# Altium PCB radxa_cm3_io_board_v1360_pcb_layout.PcbDoc (part 3 of 7)
Units mil, origin at the board's own origin, x right, y up, seen from the top; angles counter-clockwise.
Board outline 6299.61 x 3544.09 mil, 4 copper layers (Top, GND, Power, Bottom), stack 35.4 mil thick; 513 components, 397 nets, 1855 pads, 2695 vias.
Unrouted connection lines stored in the file: 280.
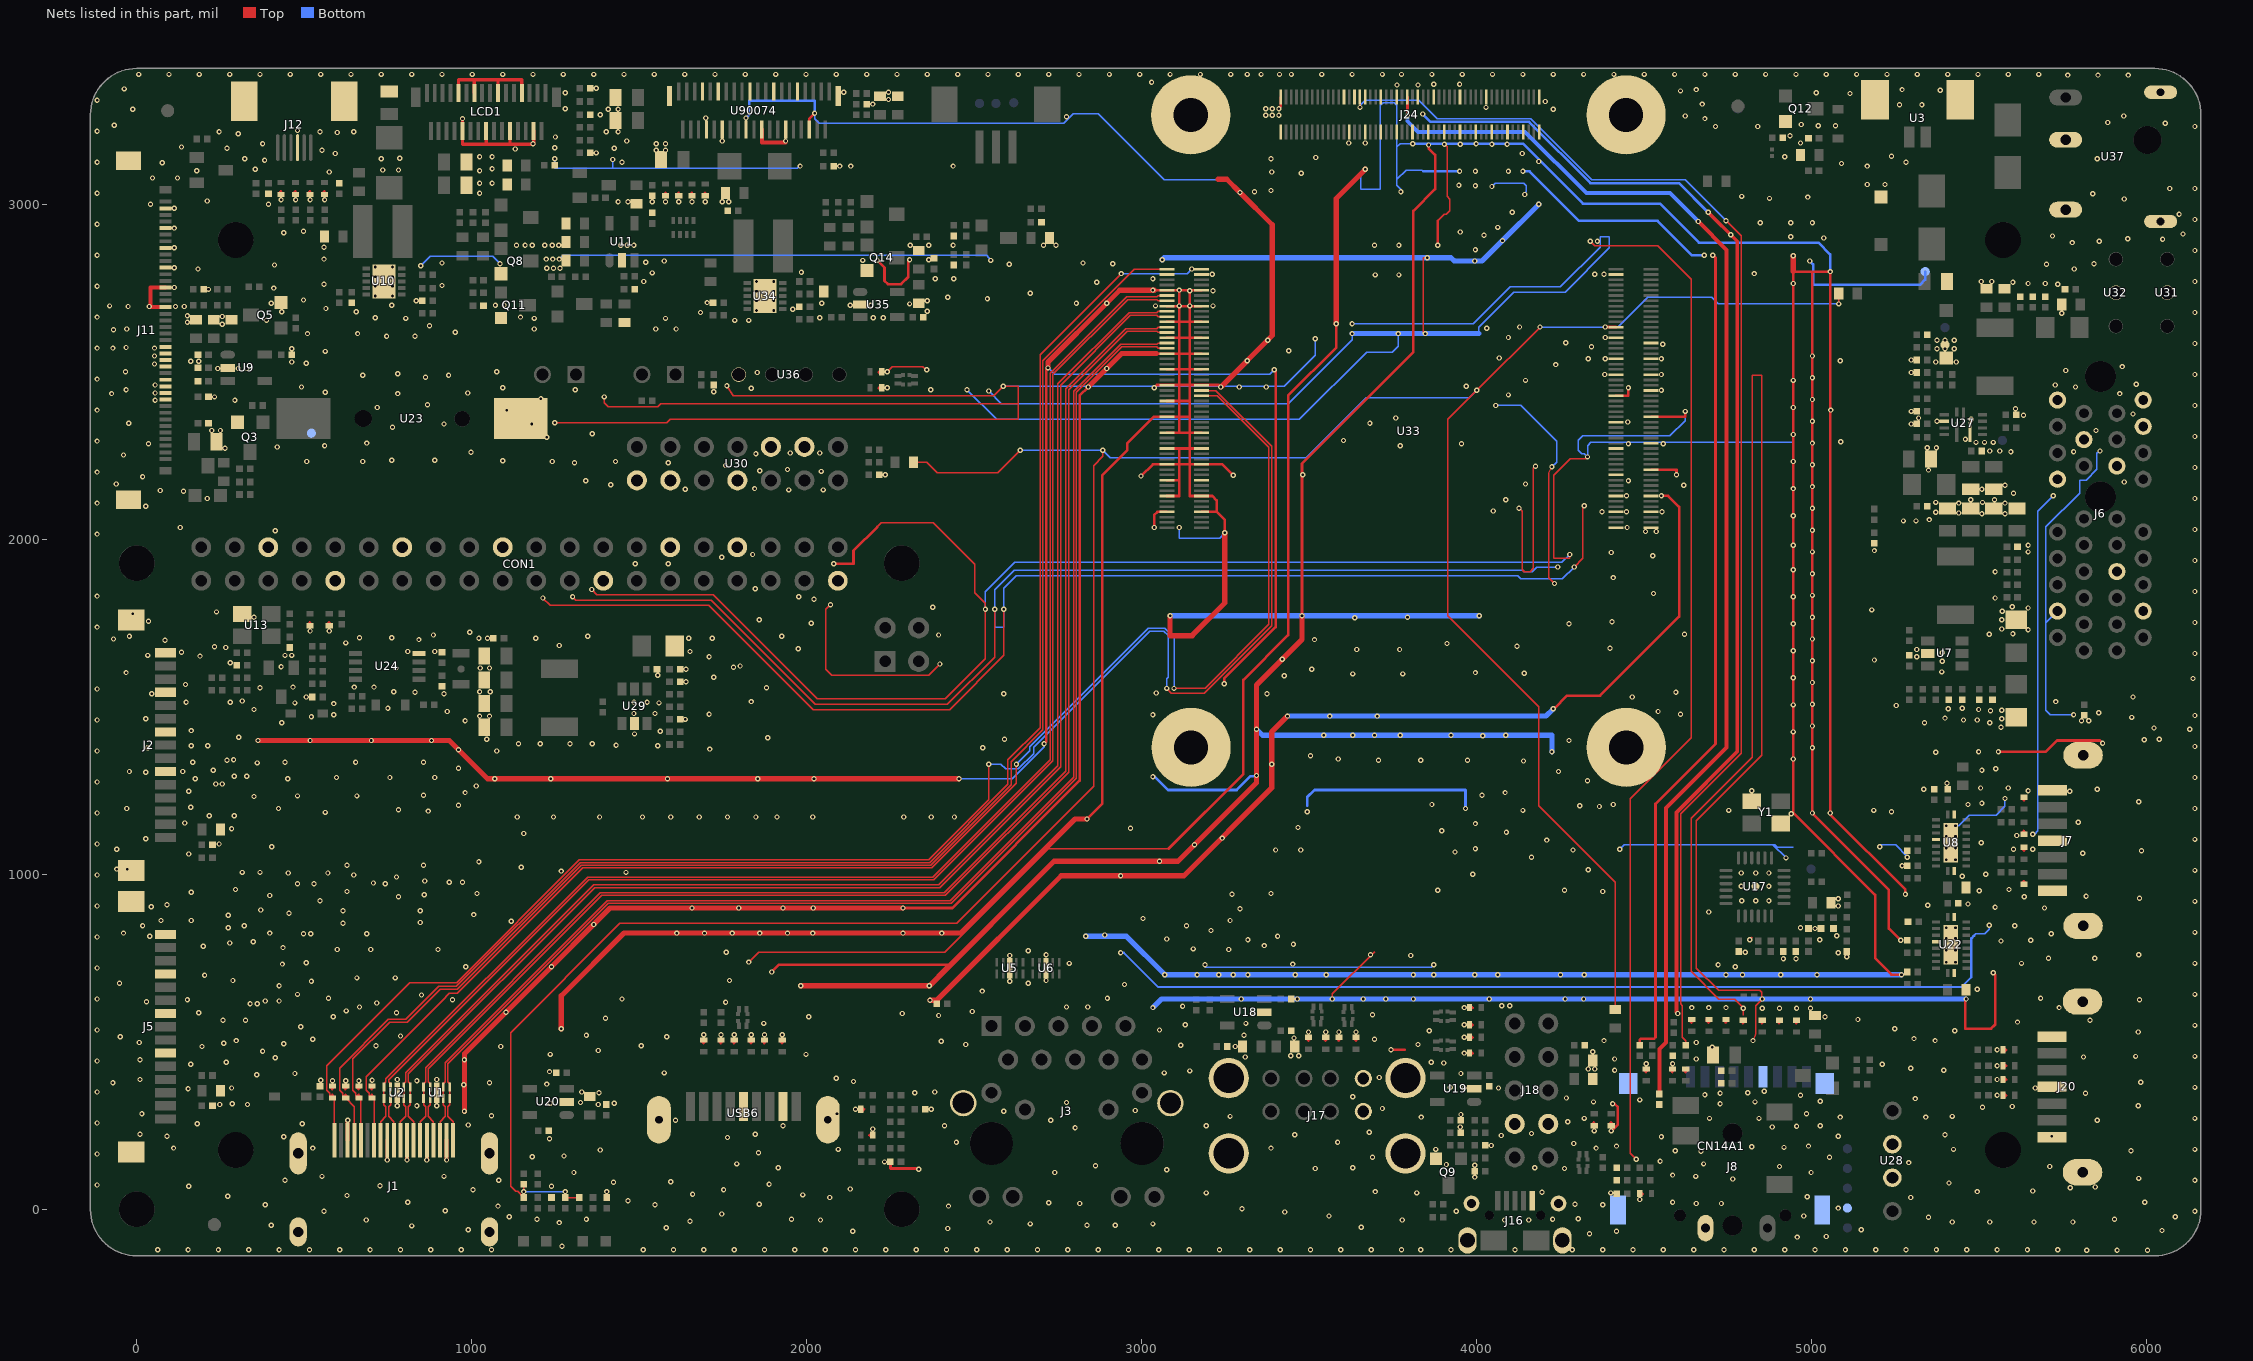
[diagram p5: the nets of this part, all layers, seen from the top]

## Via types
v1: diameter 15.75, hole 7.87, Top to Bottom, 2660 vias
v2: diameter 19.68, hole 11.81, Top to Bottom, 35 vias

## Nets (pads, with @x,y where several pads share a name; then routed paths per layer and width w, separated by ;. In a path a pad name is that pad's centre, name@x,y a point inside that pad or via, vN(x,y) a via of type N, cw(c..) or ccw(c..) an arc to the next point about the centre after c; other vN are vias at no path point) (continued)
GND: C1.2 C2.2 C3.1 C4.2 C5.2 C7.2 C8.2 C10.2 C11.2 C13.2 C14.2 C15.2 C16.2 C17.2 C18.2 C19.2 C20.2 C21.2 C22.2 C23.2 C25.1 C26.1 C27.2 C28.2 C29.2 C30.2 C35.2 C36.2 C37.2 C39.2 C40.2 C41.2 C42.2 C45.2 C46.2 C47.2 C48.2 C49.2 C50.2 C51.2 C52.2 C53.1 C54.2 C56.2 C57.2 C58.2 C59.2 C60.2 C61.2 C62.2 C63.2 C70.2 C72.2 C83.1 C84.2 C85.2 C86.2 C87.2 C88.2 C89.2 C91.2 C92.2 C93.2 C94.2 C95.2 C96.2 C97.2 C98.2 C99.2 C100.2 C101.2 C109.2 C111.2 C123.2 C124.2 C125.2 C130.2 C131.2 C132.2 C133.2 C134.2 C135.2 C136.2 C137.2 C138.2 C139.2 C140.2 C141.2 C142.2 C143.2 C144.2 C146.2 C147.2 C149.2 C150.2 C151.1 C152.2 C153.2 C154.2 C155.2 C156.2 C157.2 C158.2 C159.2 C160.2 C161.2 C164.1 C166.2 C167.2 C168.2 C169.2 C170.2 C171.2 C172.2 C173.2 C174.2 C175.2 C176.2 CN14A1.6 CN14A1.10 CN14A1.11 CN14A1.12 CN14A1.13 CON1.6 CON1.9 CON1.14 CON1.20 CON1.25 CON1.30 CON1.34 CON1.39 D2.1 D3.1 D4.1 D5.1 D6.1 D7.1 D8.1 D9.1 D10.1 D11.1 D12.1 D14.2 D15.2 D16.2 D17.2 D18.1 D19.1 D20.1 D21.1 D22.1 D23.1 D24.1 D25.1 D26.1 D27.1 D30.1 D31.1 D32.1 D33.1 D34.1 D35.1 D36.1 D37.1 D38.1 D39.1 D40.1 D41.1 D47.1 D48.1 D49.1 ED1.2 ED2.2 ED3.2 ED4.2 ED9.2 ED10.2 ED11.2 ED12.2 ED13.2 ED14.2 ED15.2 ED16.2 ED17.2 ED18.2 ED19.2 J1.2 J1.5 J1.8 J1.11 J1.17 J1.20 J1.21 J1.22 J1.23 J2.6 J2.9 J2.12 J2.15 J2.16 J2.17 J3.19 J3.20 J5.6 J5.9 J5.12 J5.15 J5.16 J5.17 J6.A4 J6.A12 J6.A15 J6.A18 J6.B4 J6.B7 J6.B13 J6.B16 J6.B18 J7.1 J7.4 J7.7 J7.8 J7.9 J8.2 J11.2 J11.5 J11.8 J11.11 J11.14 J11.17 J11.23 J11.24 J11.25 J11.26 J11.28 J11.29 J11.30 J11.31 J11.43 J11.44 J12.3 J12.7 J12.8 J16.5 J16.6 J16.7 J16.8 J16.9 J17.4 J17.8 J17.9 J17.10 J17.11 J17.12 J18.7 J18.8 J20.1 J20.4 J20.7 J20.8 J20.9 J24.1 J24.2 J24.7 J24.13 J24.19 J24.22 J24.25 J24.31 J24.32 J24.37 J24.42 J24.43 J24.48 J24.49 J24.55 J24.56 J24.61 J24.62 J24.67 J24.68 J24.72 J24.73 J24.76 J24.99 J24.100 LCD1.9 LCD1.10 LCD1.13 LCD1.16 LCD1.19 LCD1.22 LCD1.25 LCD1.28 P6.1 Q3.2 Q5.2 Q8.2 Q9.2 Q11.2 Q12.2 Q14.2 R1.1 R7.1 R17.2 R18.2 R20.2 R25.1 R26.2 R27.1 R30.1 R33.1 R38.1 R42.2 R43.2 R52.1 R55.2 R56.2 R60.2 R67.1 R72.2 R73.1 R97.1 R101.2 R102.2 R108.2 R115.2 R119.2 R127.2 R132.1 R133.2 R152.1 R154.1 R160.2 R161.2 R166.2 R174.2 R177.2 R182.2 R187.1 R189.2 R192.2 R195.2 R206.1 R208.1 R9209.2 TP1.1 TP7.1 TP11.1 U1.3 U1.8 U2.3 U2.8 U3.3 U3.4 U5.3 U5.8 U6.3 U6.8 U7.2 U8.4 U8.10 U8.19 U8.21 U9.2 U10.11 U11.2 U13.2 U17.25 U18.2 U19.2 U20.2 U22.4 U22.10 U22.19 U22.21 U23.2 U24.4 U27.2 U27.10 U28.2 U28.3 U29.2 U30.1 U30.3 U30.7 U30.10 U30.12 U31.2 U32.2 U33.1 U33.2 U33.7 U33.8 U33.13 U33.14 U33.22 U33.23 U33.32 U33.33 U33.42 U33.43 U33.52 U33.53 U33.59 U33.60 U33.65 U33.66 U33.71 U33.74 U33.98 U33.107 U33.108 U33.113 U33.114 U33.119 U33.120 U33.125 U33.126 U33.131 U33.132 U33.137 U33.138 U33.144 U33.150 U33.155 U33.156 U33.161 U33.162 U33.167 U33.168 U33.173 U33.174 U33.179 U33.180 U33.185 U33.186 U33.191 U33.192 U33.197 U33.198 U33.201 U33.202 U33.203 U33.204 U34.11 U35.2 U36.4 U37.2 U37.3 U37.4 U37.5 U90074.6 U90074.9 U90074.12 U90074.15 U90074.18 U90074.21 U90074.22 U90074.28 U90074.29 U90074.32 U90074.33 U90074.40 U90074.41 USB6.4 USB6.7 USB6.10 USB6.11 Y1.2 Y1.4 | length 100096.5
  Top w3.94: v1(1212.6,1824.8) 1234.25,1803.15 1707.93,1803.15 2018.95,1492.13 2426.61,1492.13 2588.58,1654.1 v1(2588.58,1791.34) ; v1(1248.03,2348.43) 1582.68,2348.43 1592.52,2358.27 2631.89,2358.27 2631.89,2405.51 ; v1(1301.18,1828.74) 1311.02,1818.9 1714.45,1818.9 2025.47,1507.87 2420.08,1507.87 2561.02,1648.81 v1(2561.02,1791.34) ; v1(1358.27,1850.39) 1374.02,1834.65 1720.97,1834.65 2032,1523.62 2413.56,1523.62 2533.46,1643.53 v1(2533.46,1791.34) 2533.46,1809.06 2501.97,1840.55 2501.97,1925.2 2377.95,2049.21 2222.44,2049.21 2210.63,2037.4 ; v1(1395.67,2425.2) 1395.67,2407.48 1407.48,2395.67 1555.12,2395.67 1564.96,2405.51 2631.89,2405.51 ; v1(1761.81,2458.66) 1781.5,2429.13 2559.06,2429.13 v1(2586.61,2456.69) 2631.89,2456.69 2631.89,2405.51 ; v1(1826.77,738.19) 1856.3,767.72 2411.42,767.72 2720.47,1076.77 3080.71,1076.77 ; v1(2070.87,1805.12) 2057.09,1791.34 2057.09,1612.2 2074.8,1594.49 2364.17,1594.49 v1(2397.64,1627.95) ; v1(2240.16,2500) 2255.91,2515.75 2346.46,2515.75 2356.3,2505.91 v1(2358.27,2505.91) ; v1(3568.9,627.95) 3568.9,643.7 3694.88,769.68 ; v1(3846.46,2614.17) 3840.55,2620.08 3840.55,2840.55 v1(3852.36,2840.55) ; 3883.86,2950.79 3903.54,2970.47 3909.45,2970.47 3919.29,2980.31 3919.29,3015.75 3911.42,3023.62 3911.42,3171.26 v1(3903.54,3179.13) ; v1(4125.98,2092.52) 4127.95,2092.52 4135.83,2084.65 4135.83,1909.45 4141.73,1903.54 4159.45,1903.54 4169.29,1913.39 4169.29,2212.6 v1(4175.2,2218.5) ; v1(4224.41,2216.54) 4214.57,2198.82 4214.57,1885.83 v1(4232.28,1868.11) ; v1(4277.56,1954.72) 4277.56,1942.91 4230.31,1942.91 4230.31,2190.94 4279.53,2240.16 4324.8,2240.16 v1(4330.71,2246.06) ; v1(4291.34,1917.32) 4316.93,1942.91 4316.93,2096.46 4320.87,2104.33 v1(4320.87,2100.39) ; v1(4338.58,2889.76) 4352.36,2875.98 4540.72,2875.98 4639.76,2776.94 4639.76,1407.56 4458.66,1226.46 4458.66,167.32 v1(4476.38,149.61) ; 4795.28,580.12 v1(4795.28,600.39) 4795.28,602.36 4769.69,627.95 4722.44,627.95 4639.76,710.63 4639.76,1167.26 4822.83,1350.34 4822.83,2490.16 4850.39,2490.16 4850.39,1355.62 4655.51,1160.74 4655.51,720.47 4722.44,653.54 4844.49,653.54 4850.39,647.64 4850.39,625.98 4832.68,608.27 4832.68,523.62 v1(4824.8,503.94) ; v1(4814.96,805.12) 4822.83,812.99
  Top w7.87: v1(1895.67,708.66) 1917.32,730.31 2419.29,730.31 2419.29,720.47 ; U90074.6@2007.87,3223.43 2007.87,3255.91 v1(2023.62,3271.65) ; v1(2080.71,1927.17) 2139.76,1927.17 2139.76,1966.54 2210.63,2037.4 ; v1(2210.63,2832.68) 2232.28,2811.02 2232.28,2771.65 2242.13,2761.81 2281.5,2761.81 2303.15,2783.46 2303.15,2830.71 v1(2307.09,2834.65) ; R1.1@2250,141.73 2250,122.05 2332.68,122.05 v1(2334.65,120.08) ; v1(2287.4,899.61) 2435.02,899.61 2814.96,1279.55 2814.96,2429.13 v1(2840.55,2454.72) ; v1(2708.66,1389.76) 2714.57,1395.67 2714.57,2505.91 v1(2720.47,2511.81) ; v1(2836.61,1165.35) 2881.89,1210.63 2881.89,2190.94 2956.69,2265.75 2956.69,2286.61 3035.63,2365.55 U33.144@3075.2,2365.55 3112.2,2365.55 ; v1(2998.03,2188.98) 3033.46,2223.82 U33.126@3075.2,2223.82 ; v1(3037.4,2035.43) 3037.4,2072.83 3046.65,2082.09 U33.108@3075.2,2082.09 ; v1(3037.4,2452.76) 3045.28,2460.63 3112.2,2460.63 ; v1@3037.4,2743.5 U33.192@3075.2,2743.5 v1@3112.2,2743.5 ; 3043.31,2554.53 U33.168@3075.2,2554.53 3112.2,2554.53 ; U33.114@3075.2,2129.33 3112.2,2129.33 3112.2,2223.82 ; U33.120@3075.2,2176.57 3112.2,2176.57 3112.2,2223.82 ; U33.138@3075.2,2318.31 3112.2,2318.31 ; U33.150@3075.2,2412.8 3112.2,2412.8 ; U33.156@3075.2,2460.04 3112.2,2460.04 ; U33.162@3075.2,2507.28 3112.2,2507.28 ; U33.174@3075.2,2601.77 3112.2,2601.77 ; U33.180@3075.2,2649.02 3112.2,2649.02 ; U33.186@3075.2,2696.26 v1@3112.2,2696.26 ; 3080.71,1076.77 3303.15,1299.21 3303.15,1580.71 3437.01,1714.57 3437.01,2429.13 3580.71,2572.83 v1(3580.71,2643.7) ; 3111.64,2318.31 3112.2,2317.74 3112.2,2318.31 ; v1(3112.2,2744.09) v1@3112.2,2743.5 ; v1(3143.7,2742.13) v1(3143.7,2696.85) v1@3143.7,2696.26 ; U33.107@3179.13,2082.09 3223.82,2082.09 ; U33.131@3179.13,2271.06 3143.7,2271.06 ; U33.137@3179.13,2318.31 3143.7,2318.31 ; U33.155@3179.13,2460.04 3143.7,2460.04 ; U33.191@3179.13,2743.5 v1@3112.2,2743.5 ; v1(3236.22,2454.72) 3230.31,2460.63 3143.7,2460.63 ; v1(3246.06,1568.9) 3246.06,1584.65 3399.61,1738.19 3399.61,2501.97 v1(3395.67,2505.91) ; v1(3248.03,2019.68) 3248.03,2058.46 3224.41,2082.09 3223.82,2082.09 ; v1(3273.62,2190.94) 3240.75,2223.82 U33.125@3179.13,2223.82 3143.7,2223.82 ; v1(3409.45,3285.43) 3414.76,3290.75 J24.100@3414.76,3320.08 ; v1(3478.35,1771.65) 3478.35,2226.38 3811.02,2559.06 3811.02,2980.31 3875.98,3045.28 3875.98,3147.64 3856.3,3167.32 v1(3856.3,3177.17) ; v1(3744.09,476.38) 3785.43,476.38 ; v1(3883.86,2877.95) 3883.86,2950.79 ; v1(4228.35,1494.09) 4230.31,1494.09 4269.69,1533.46 4368.11,1533.46 4604.33,1769.68 4604.33,2096.46 4570.87,2129.92 v1(4551.18,2129.92) ; v1(4401.57,234.25) 4421.26,253.94 4421.26,305.12 4411.42,314.96 v1(4405.51,314.96) ; U33.52@4415.75,2428.54 4452.76,2428.54 v1(4452.76,2452.76) ; C15.2@4486.22,490.16 4486.22,505.91 4490.16,509.84 4529.53,509.84 4533.46,513.78 4533.46,1210.63 4712.6,1389.76 4712.6,2840.55 v1(4704.72,2848.43) ; U33.23@4520.47,2208.07 4596.46,2208.07 v1(4596.46,2192.91) ; U33.43@4520.47,2365.55 4622.05,2365.55 v1(4622.05,2381.89) ; v1(5001.97,2482.28) v1(5001.97,2547.24) ; v1(5265.75,803.15) 5230.31,838.58 5230.31,952.76 5001.97,1181.1 v1(5001.97,1183.07) v1(5001.97,1377.95) v1(5001.97,1442.91) v1(5001.97,1507.87) v1(5001.97,1572.83) v1(5001.97,1637.8) v1(5001.97,1702.76) v1(5001.97,1767.72) v1(5001.97,1832.68) v1(5001.97,1897.64) v1(5001.97,1962.6) v1(5001.97,2027.56) v1(5001.97,2092.52) v1(5001.97,2157.48) v1(5001.97,2222.44) v1(5001.97,2417.32) v1(5001.97,2352.36) v1(5001.97,2287.4) v1(5001.97,2547.24) ; v1(5267.72,700.79) 5238.19,700.79 5188.98,750 5188.98,938.98 4944.88,1183.07 4944.88,2799.21 ; v1(5279.53,940.94) 5279.53,954.72 5055.12,1179.13 v1(5055.12,1183.07) v1(5055.12,2799.21) 4944.88,2799.21 ; v1(5460.63,627.95) 5458.66,625.98 5458.66,539.37 5535.43,539.37 5547.24,551.18 5547.24,700.79 v1(5541.34,706.69) ; v1(5557.09,1366.14) 5698.82,1366.14 5732.28,1399.61 5860.24,1399.61 v1(5868.11,1391.73) ; U33.126@3075.2,2223.82 3112.2,2223.82 ; U33.126@3075.2,2223.82 3143.7,2223.82 ; 3112.2,2223.82 3112.2,2271.06 ; 3112.2,2223.82 3143.7,2223.82 ; 3112.2,2271.06 3143.7,2271.06 ; 3112.2,2271.06 U33.132@3075.2,2271.06 3143.7,2271.06 ; 3112.2,2318.31 3112.2,2365.55 ; 3112.2,2318.31 3143.7,2318.31 ; 3112.2,2365.55 3143.7,2365.55 ; 3112.2,2365.55 3112.2,2412.8 ; 3112.2,2412.8 3143.7,2412.8 ; 3112.2,2412.8 3112.2,2460.04 ; 3112.2,2460.04 3143.7,2460.04 ; 3112.2,2460.04 3112.2,2460.63 ; 3112.2,2460.63 3143.7,2460.63 ; 3112.2,2460.63 3112.2,2507.28 ; 3112.2,2507.28 3143.7,2507.28 ; 3112.2,2507.28 3112.2,2554.53 ; 3112.2,2507.28 U33.161@3179.13,2507.28 3143.7,2507.28 ; 3112.2,2554.53 3143.7,2554.53 ; 3112.2,2554.53 3112.2,2601.77 ; 3112.2,2554.53 U33.167@3179.13,2554.53 3143.7,2554.53 ; 3112.2,2601.77 3143.7,2601.77 ; 3112.2,2601.77 3112.2,2649.02 ; 3112.2,2601.77 U33.173@3179.13,2601.77 3143.7,2601.77 ; 3112.2,2649.02 3143.7,2649.02 ; 3112.2,2649.02 v1@3112.2,2696.26 ; 3112.2,2649.02 U33.179@3179.13,2649.02 3143.7,2649.02 ; v1@3112.2,2696.26 v1@3143.7,2696.26 ; v1@3112.2,2696.26 v1(3112.2,2696.85) v1@3112.2,2743.5 ; v1@3112.2,2696.26 U33.185@3179.13,2696.26 v1@3143.7,2696.26 ; 3143.7,2223.82 3143.7,2271.06 ; 3143.7,2223.82 3143.7,2129.33 U33.113@3179.13,2129.33 3210.63,2129.33 3223.82,2116.14 3223.82,2082.09 ; 3143.7,2271.06 3143.7,2318.31 ; 3143.7,2318.31 3143.7,2365.55 ; 3143.7,2365.55 3143.7,2412.8 ; 3143.7,2412.8 3143.7,2460.04 ; 3143.7,2460.04 3143.7,2460.63 ; 3143.7,2460.63 3143.7,2507.28 ; 3143.7,2507.28 3143.7,2554.53 ; 3143.7,2554.53 3143.7,2601.77 ; 3143.7,2601.77 3143.7,2649.02 ; 3143.7,2649.02 v1@3143.7,2696.26 ; 4944.88,2799.21 5001.97,2799.21 v1(5001.97,2547.24)
  Top w9.84: LCD1.9@960.63,3332.68 960.63,3372.05 1007.87,3372.05 ; v1(972.44,3255.91) 972.44,3179.13 ; LCD1.13@1007.87,3332.68 1007.87,3372.05 ; LCD1.16@1043.3,3219.5 1043.3,3179.13 972.44,3179.13 ; LCD1.19@1078.74,3332.68 1078.74,3372.05 1007.87,3372.05 ; LCD1.22@1114.17,3219.5 1114.17,3179.13 972.44,3179.13 ; LCD1.25@1149.6,3332.68 1149.6,3372.05 1007.87,3372.05 ; LCD1.28@1185.04,3219.5 1185.04,3179.13 972.44,3179.13
  Top w11.81: J11.17@86.61,2692.91 41.34,2692.91 41.34,2751.97 J11.14@86.61,2751.97 ; J1.17@629.93,206.69 v1(629.92,265.75) ; v1(748.03,147.64) J1.11@748.04,206.69 ; v1(807.09,147.64) J1.8@807.09,206.69 ; v1(866.14,147.64) J1.5@866.15,206.69 ; v1(925.2,147.64) J1.2@925.2,206.69 ; U90074.18@1866.14,3223.43 1866.14,3185.04 1937.01,3185.04 v1(1937.01,3188.98) ; v1(4600.39,584.65) 4596.46,588.58 4596.46,1185.2 4777.56,1366.31 4777.56,2889.76 v1(4690.94,2976.38)
  Top w15.75: v1(362.2,1399.61) v1(517.72,1399.61) v1(700.79,1399.61) v1(879.92,1399.61) 933.07,1399.61 v1(960.63,1372.05) 1047.24,1285.43 v1(1068.9,1285.43) v1(1236.22,1285.43) v1(1584.65,1285.43) v1(1854.33,1285.43) v1(2021.65,1285.43) v1(2454.72,1285.43) ; v1(978.35,293.31) 978.35,464.57 v1(1102.36,588.58) v1(1238.19,724.41) v1(1364.17,850.39) 1413.39,899.61 v1(1657.48,899.61) v1(1797.24,899.61) v1(1929.13,899.61) v1(2019.69,899.61) v1(2287.4,899.61) ; v1(1267.72,539.37) 1267.72,637.8 1454.72,824.8 v1(1612.2,824.8) v1(1694.88,824.8) v1(1777.56,824.8) v1(1860.24,824.8) v1(1942.91,824.8) v1(2017.72,824.8) v1(2287.4,824.8) v1(2403.54,824.8) 2460.63,824.8 2801.18,1165.35 v1(2836.61,1165.35) ; v1(1982.28,667.32) v1(2366.14,667.32) ; v1(2368.11,624.02) 2387.8,624.02 2759.84,996.06 v1(2937.01,996.06) 3126.21,996.06 3387.8,1257.65 v1(3387.8,1328.74) 3387.8,1425.2 v1(3435.04,1472.44) ; 2419.29,720.47 v1(2366.14,667.32) ; v1(2720.47,2511.81) 2720.47,2529.53 v1(2895.67,2704.72) 2934.45,2743.5 v1@3037.4,2743.5 ; v1(2840.55,2454.72) v1(2895.67,2509.84) 2940.35,2554.53 3043.31,2554.53 ; v1(3084.65,1771.65) 3084.65,1712.6 3150.48,1712.6 3248.03,1810.15 v1(3248.03,2019.68) ; 3228.35,3074.8 3253.94,3074.8 v1(3293.31,3035.43) 3389.76,2938.98 3389.76,2608.27 v1(3236.22,2454.72) ; v1(3478.35,1771.65) 3478.35,1700.79 v1(3419.29,1641.73) 3342.52,1564.96 v1(3342.52,1433.07) v1(3342.52,1295.28) 3342.52,1273.62 v1(3157.48,1088.58) 3108.27,1039.37 v1(3053.15,1039.37) 2738.19,1039.37 v1(2366.14,667.32) ; v1(3580.71,2643.7) 3580.71,3017.72 v1(3667.32,3104.33) ; 4944.88,2799.21 v1(4944.88,2846.46)
  Bottom w3.94: v1(848.43,2816.93) 875.98,2844.49 1062.99,2844.49 v1(1084.65,2822.83) ; v1(1248.03,3135.83) 1248.03,3108.27 1421.26,3108.27 ; v1(1261.81,2836.61) 1273.62,2848.43 2537.4,2848.43 v1(2549.21,2832.68) ; v1(1421.26,3133.86) 1421.26,3108.27 ; v1(1980.31,3114.17) 1978.35,3114.17 1972.44,3108.27 1421.26,3108.27 ; v1(2023.62,3271.65) 2023.62,3255.91 2037.4,3242.13 2767.72,3242.13 2795.28,3269.68 2870.08,3269.68 3066.93,3072.83 3255.91,3072.83 v1(3293.31,3035.43) ; v1(2478.35,2446.85) 2566.93,2358.27 3470.47,2358.27 3671.26,2559.06 3748.03,2559.06 3765.75,2576.77 v1(3765.75,2614.17) ; 2525.59,1285.43 2613.3,1285.43 2709.21,1381.34 2708.66,1381.89 v1(2708.66,1389.76) ; v1(2533.46,1791.34) 2533.46,1843.99 2620.58,1931.1 4253.94,1931.1 v1(4277.56,1954.72) ; v1(2543.31,2442.91) 2580.71,2405.51 3437.01,2405.51 3627.95,2596.46 v1(3627.95,2614.17) ; v1(2586.61,2456.69) 3425.2,2456.69 3517.72,2549.21 v1(3517.72,2598.43) ; v1(2720.47,2511.81) 2740.16,2492.13 3381.89,2492.13 v1(3395.67,2505.91) ; v1(3112.2,2035.43) 3112.2,2003.94 3232.28,2003.94 v1(3248.03,2019.68) ; v1(3188.98,730.31) 3188.98,722.44 3864.17,722.44 v1(3872.05,730.31) ; v1(3627.95,2643.7) 3990.16,2643.7 4100.39,2753.94 4250,2753.94 4368.11,2872.05 4368.11,2903.54 4395.67,2903.54 4395.67,2870.08 4263.78,2738.19 4110.24,2738.19 4005.91,2633.86 4005.91,2614.17 ; v1(3667.32,3104.33) 3653.54,3090.55 3653.54,3045.28 3712.6,3045.28 3712.6,3295.28 3720.47,3303.15 3753.94,3303.15 3761.81,3295.28 3761.81,3171.26 ; v1(3773.62,3037.4) 3773.62,3045.28 3761.81,3057.09 3761.81,3074.8 ; v1(3809.06,3181.1) 3771.65,3181.1 3761.81,3171.26 ; 3840.55,3098.43 3836.61,3102.36 3789.37,3102.36 3761.81,3074.8 ; v1(4045.28,3053.15) 4055.12,3062.99 4139.76,3062.99 4147.64,3055.12 4147.64,3037.4 4143.7,3033.46 v1(4143.7,3029.53) ; v1(4057.09,2399.61) 4131.89,2399.61 4238.19,2293.31 4238.19,2230.31 v1(4224.41,2216.54) ; v1(4242.13,1917.32) 4179.13,1917.32 4165.35,1903.54 4141.73,1903.54 4137.8,1907.48 2619.23,1907.48 2561.02,1849.27 v1(2561.02,1791.34) 2561.02,1738.19 2588.58,1738.19 v1(2588.58,1791.34) 2588.58,1854.56 2625.75,1891.73 4122.05,1891.73 4131.89,1881.89 4255.91,1881.89 v1(4291.34,1917.32) ; v1(4427.17,1074.8) 4440.94,1088.58 4874.15,1088.58 ; v1(4622.05,2381.89) 4622.05,2354.53 4576.57,2309.06 4316.93,2309.06 4303.15,2295.28 4303.15,2265.95 4313.65,2255.45 4321.32,2255.45 v1(4330.71,2246.06) 4330.71,2279.53 4340.55,2289.37 4944.88,2289.37 v1(4944.88,2312.99) ; v1(4923.23,1049.21) 4883.86,1088.58 4874.15,1088.58 ; 4944.88,1080.71 4897.01,1080.71 4889.14,1088.58 4874.15,1088.58 ; v1(5202.76,1082.68) 5208.66,1088.58 5250,1088.58 5285.43,1053.15 v1(5285.43,1051.18) ; v1(5429.13,1145.67) 5438.98,1145.67 5470.47,1177.17 5551.18,1177.17 5576.77,1202.76 v1(5576.77,1226.38) ; 5484.25,816.93 5490.16,822.83 5515.75,822.83 5529.53,836.61 v1(5529.53,848.43) ; v1(5659.45,1120.08) 5665.35,1120.08 5675.2,1129.92 5675.2,2084.65 v1(5720.47,2129.92) ; J6.A4@5733.46,1785.83 5698.82,1751.18 5698.82,1490.16 ; v1(5781.5,1476.38) 5712.6,1476.38 5698.82,1490.16 ; v1(5860.24,2263.78) 5854.33,2257.87 5850.39,2257.87 5850.39,2208.66 5818.9,2177.17 5799.21,2177.17 5799.21,2137.8 5698.82,2037.4 5698.82,1490.16 ; 3761.81,3074.8 3761.81,3171.26
  Bottom w5.91: v1(2454.72,1285.43) 2525.59,1285.43 ; 2946.85,765.75 3049.21,663.39 5446.85,663.39 5476.38,692.91
  Bottom w7.87: v1(1818.9,3257.87) 1828.74,3267.72 1828.74,3309.06 2023.62,3309.06 v1(2023.62,3271.65) ; v1(2937.01,765.75) 2946.85,765.75 ; v1(3033.46,1291.34) 3039.37,1291.34 3078.74,1251.97 3283.46,1251.97 3324.8,1293.31 3340.55,1293.31 v1(3342.52,1295.28) ; 3494.09,1204.72 3494.09,1230.31 3515.75,1251.97 3966.54,1251.97 v1(3966.54,1196.85) ; v1(3809.06,3181.1) v1(3998.03,3181.1) 4137.8,3181.1 4316.93,3001.97 4547.24,3001.97 4663.39,2885.83 5019.69,2885.83 5055.12,2850.39 v1(5055.12,2799.21) ; v1(3838.58,3269.68) 3862.2,3246.06 4156.55,3246.06 4339.62,3062.99 4604.33,3062.99 v1(4690.94,2976.38) ; 3840.55,3098.43 v1(3948.82,3098.43) ; v1(4137.8,3098.43) 4157.48,3098.43 4305.12,2950.79 4539.37,2950.79 4641.73,2848.43 v1(4679.13,2848.43) ; v1(4994.09,2830.71) 5003.94,2820.87 5003.94,2759.84 5322.83,2759.84 5338.58,2775.59 TP11.1@5338.58,2799.21 ; 5476.38,692.91 5476.38,809.06 5484.25,816.93
  Bottom w15.75: v1(2832.68,814.96) 2954.72,814.96 v1(3068.9,700.79) v1(5267.72,700.79) ; v1(3033.46,602.36) 3059.06,627.95 v1(3297.24,627.95) v1(3464.57,627.95) v1(3568.9,627.95) v1(3661.42,627.95) v1(3728.35,627.95) v1(3811.02,627.95) v1(4037.4,627.95) v1(4263.78,627.95) v1(4318.9,627.95) v1(5460.63,627.95) ; v1(3061.02,2834.65) 3066.93,2840.55 v1(3852.36,2840.55) 3923.23,2840.55 3933.07,2830.71 4015.75,2830.71 v1(4076.77,2891.73) v1(4185.04,3000) ; v1(3084.65,1771.65) v1(3478.35,1771.65) v1(4007.87,1771.65) ; v1(3342.52,1433.07) 3360.24,1415.35 v1(3543.31,1415.35) v1(3629.92,1415.35) v1(3694.88,1415.35) v1(3771.65,1415.35) v1(3923.23,1415.35) v1(4086.61,1415.35) 4224.41,1415.35 v1(4224.41,1366.14) ; v1(3435.04,1472.44) 4206.69,1472.44 v1(4228.35,1494.09) ; v1(3627.95,2614.17) v1(3765.75,2614.17) 4005.91,2614.17
  other v1: 5820.87,-122.05 5911.42,-122.05 6001.97,-122.05 62.99,-120.08 153.54,-120.08 244.09,-120.08 334.65,-120.08 425.2,-120.08 515.75,-120.08 606.3,-120.08 696.85,-120.08 787.4,-120.08 877.95,-120.08 968.5,-120.08 1059.06,-120.08 1511.81,-120.08 1602.36,-120.08 1692.91,-120.08 1783.46,-120.08 1874.02,-120.08 1964.57,-120.08 2055.12,-120.08 2145.67,-120.08 2236.22,-120.08 2326.77,-120.08 2417.32,-120.08 2507.87,-120.08 2598.43,-120.08 2688.98,-120.08 2779.53,-120.08 2870.08,-120.08 2960.63,-120.08 3051.18,-120.08 3141.73,-120.08 3232.28,-120.08 3322.83,-120.08 3413.39,-120.08 3503.94,-120.08 3594.49,-120.08 3685.04,-120.08 3775.59,-120.08 3832.68,-120.08 3923.23,-120.08 4114.17,-120.08 4285.43,-120.08 4375.98,-120.08 4466.54,-120.08 4557.09,-120.08 4647.64,-120.08 4738.19,-120.08 4828.74,-120.08 4919.29,-120.08 5009.84,-120.08 5100.39,-120.08 5190.94,-120.08 5281.5,-120.08 5372.05,-120.08 5462.6,-120.08 5553.15,-120.08 5643.7,-120.08 5734.25,-120.08 1269.69,-110.24 4956.69,-82.68 5043.31,-80.71 4336.61,-72.83 2137.8,-64.96 4417.32,-64.96 6045.28,-62.99 990.16,-61.02 5147.64,-61.02 2421.26,-57.09 1580.71,-55.12 3655.51,-53.15 820.87,-49.21 401.57,-47.24 2836.61,-47.24 2921.26,-47.24 2667.32,-43.31 3033.46,-43.31 1261.81,-39.37 2547.24,-37.4 5419.29,-37.4 5531.5,-37.4 5663.39,-37.4 5779.53,-37.4 1651.57,-35.43 685.04,-31.5 2041.34,-31.5 3777.56,-31.5 4082.68,-31.5 4155.51,-31.5 1194.88,-29.53 1342.52,-29.53 1954.72,-29.53 4226.38,-29.53 5903.54,-29.53 4303.15,-27.56 5348.43,-23.62 1112.2,-21.65 6084.65,-21.65 3559.06,-19.69 4976.38,-19.69 1746.06,-13.78 3427.17,-7.87 559.06,-5.91 3938.98,-5.91 6143.7,-5.91 921.26,-3.94 3299.21,1.97 5078.74,3.94 1078.74,9.84 2423.23,9.84 383.86,13.78 1547.24,13.78 4375.98,13.78 1858.27,15.75 4293.31,15.75 2814.96,17.72 4655.51,17.72 4730.31,17.72 2722.44,19.68 809.06,21.65 4584.65,21.65 5994.09,21.65 1466.54,25.59 4486.22,29.53 2068.9,35.43 5295.28,35.43 4986.22,37.4 271.65,39.37 627.95,41.34 1988.19,43.31 1659.45,45.28 3192.91,49.21 3820.87,49.21 4399.61,49.21 4194.88,51.18 1403.54,53.15 3696.85,53.15 5494.09,53.15 5659.45,55.12 1003.94,59.06 1751.97,59.06 2129.92,61.02 5771.65,64.96 5846.46,66.93 155.51,68.9 1238.19,68.9 726.38,70.87 -118.11,72.83 1887.8,74.8 5409.45,78.74 1423.23,80.71 1594.49,82.68 442.91,86.61 1080.71,86.61 6143.7,86.61 4763.78,90.55 5976.38,92.52 3994.09,96.46 553.15,98.43 917.32,98.43 4653.54,98.43 4584.65,102.36 1305.12,110.24 2740.16,110.24 4998.03,110.24 3074.8,118.11 3517.72,122.05 4261.81,122.05 1915.35,124.02 3629.92,124.02 4173.23,124.02 4903.54,127.95 5710.63,127.95 2862.2,129.92 3994.09,131.89 3909.45,133.86 1791.34,135.83 4677.17,135.83 5289.37,139.76 2232.28,141.73 4547.24,143.7 3688.98,155.51 5053.15,155.51 1181.1,157.48 1275.59,159.45 -118.11,165.35 1856.3,169.29 4669.29,173.23 4592.52,175.2 5952.76,175.2 1383.86,177.17 2094.49,179.13 3877.95,179.13 5423.23,179.13 6143.7,179.13 110.24,183.07 525.59,183.07 3385.83,183.07 4356.3,183.07 4917.32,185.04 4820.87,187.01 4417.32,188.98 4990.16,188.98 4043.31,190.94 4289.37,196.85 2446.85,200.79 3584.65,200.79 1232.28,210.63 1763.78,214.57 438.98,216.54 4551.18,216.54 90.55,218.5 5078.74,218.5 5716.54,218.5 4072.83,220.47 3456.69,222.44 5397.64,222.44 9.84,224.41 1846.46,224.41 4163.39,226.38 3679.13,230.31 4350.39,234.25 2196.85,240.16 2801.18,244.09 3950.79,246.06 4881.89,246.06 4954.72,248.03 1929.13,250 2411.42,250 3192.91,250 5025.59,250 990.16,251.97 181.1,255.91 494.09,255.91 -118.11,257.87 4271.65,261.81 1608.27,265.75 2728.35,265.75 5852.36,265.75 4320.87,271.65 4694.88,271.65 4842.52,271.65 6143.7,271.65 3834.65,275.59 5084.65,275.59 5340.55,275.59 3263.78,277.56 5419.29,277.56 1059.06,279.53 3952.76,283.46 15.75,285.43 2090.55,285.43 4984.25,285.43 2588.58,293.31 2980.31,295.28 2145.67,299.21 2372.05,299.21 3718.5,301.18 5509.84,305.12 5598.43,307.09 777.56,309.06 836.61,309.06 895.67,309.06 5974.41,309.06 248.03,312.99 330.71,312.99 1377.95,312.99 285.43,314.96 4726.38,314.96 1234.25,316.93 1425.2,316.93 1324.8,318.9 2775.59,318.9 4348.43,320.87 4830.71,320.87 5025.59,322.83 4486.22,326.77 5309.06,330.71 4267.72,332.68 3629.92,336.61 4966.54,340.55 5553.15,340.55 4681.1,342.52 4726.38,346.46 5816.93,346.46 1379.92,348.43 2322.83,348.43 4809.06,348.43 -118.11,350.39 1328.74,350.39 2381.89,350.39 4858.27,352.36 153.54,360.24 283.46,362.2 3962.6,362.2 4064.96,362.2 5667.32,362.2 3921.26,364.17 6143.7,364.17 976.38,372.05 1224.41,374.02 -70.87,377.95 1053.15,377.95 5982.28,379.92 2139.76,381.89 584.65,383.86 624.02,383.86 663.39,383.86 836.61,383.86 549.21,385.83 702.76,385.83 9.84,387.8 777.56,387.8 895.67,387.8 5553.15,387.8 2088.58,391.73 3708.66,393.7 358.27,401.57 472.44,405.51 3952.76,405.51 1574.8,407.48 3066.93,407.48 1232.28,411.42 3143.7,413.39 4411.42,415.35 5393.7,415.35 4332.68,419.29 4352.36,419.29 5295.28,421.26 5553.15,429.13 161.42,433.07 5210.63,433.07 4505.91,435.04 4584.65,435.04 3901.57,437.01 267.72,438.98 3864.17,438.98 -118.11,442.91 9.84,446.85 978.35,446.85 4411.42,448.82 4655.51,448.82 413.39,452.76 3309.06,454.72 5811.02,454.72 5966.54,456.69 6143.7,456.69 3444.88,458.66 3468.5,458.66 1234.25,462.6 1998.03,462.6 3962.6,466.54 4346.46,470.47 375.98,472.44 1377.95,474.41 5553.15,476.38 4702.76,484.25 194.88,486.22 1086.61,486.22 3279.53,486.22 714.57,488.19 1505.91,488.19 3116.14,490.16 2474.41,492.13 3824.8,492.13 438.98,494.09 259.84,496.06 7.87,498.03 4655.51,498.03 2401.57,501.97 297.24,503.94 4379.92,503.94 5368.11,503.94 525.59,507.87 3694.88,507.87 5305.12,509.84 3454.72,511.81 3962.6,513.78 -49.21,515.75 1582.68,515.75 787.4,517.72 1342.52,519.68 3305.12,519.68 1692.91,521.65 1744.09,521.65 1783.46,521.65 1834.65,521.65 1874.02,521.65 1927.17,521.65 3498.03,529.53 3549.21,529.53 3588.58,529.53 3639.76,529.53 5974.41,529.53 3858.27,533.46 5427.17,533.46 -118.11,535.43 3053.15,535.43 5248.03,539.37 490.16,545.28 6143.7,549.21 3129.92,551.18 3962.6,551.18 1872.05,555.12 3311.02,555.12 5614.17,559.06 257.87,564.96 324.8,564.96 5830.71,564.96 5137.8,566.93 1399.61,570.87 586.61,574.8 2005.91,574.8 5039.37,574.8 2393.7,578.74 3688.98,580.71 2285.43,584.65 185.04,586.61 775.59,586.61 3330.71,588.58 2494.09,590.55 625.98,592.52 4852.36,600.39 4903.54,600.39 4954.72,600.39 4996.06,600.39 3962.6,602.36 4641.73,602.36 4692.91,602.36 4744.09,602.36 5738.19,602.36 665.35,604.33 2775.59,604.33 2838.58,604.33 3122.05,606.3 4074.8,608.27 4098.43,608.27 338.58,614.17 360.24,614.17 716.54,616.14 1757.87,618.11 29.53,620.08 383.86,622.05 425.2,622.05 151.57,625.98 942.91,625.98 5978.35,625.98 -118.11,627.95 1448.82,627.95 4852.36,627.95 4996.06,627.95 572.83,629.92 2897.64,629.92 5683.07,629.92 850.39,639.76 480.31,641.73 6143.7,641.73 2523.62,651.57 5494.09,657.48 425.2,667.32 2948.82,671.26 -51.18,675.2 2661.42,675.2 521.65,681.1 2606.3,681.1 287.4,683.07 1769.69,683.07 2714.57,683.07 657.48,690.94 771.65,690.94 202.76,698.82 3165.35,700.79 3230.31,700.79 3273.62,700.79 3316.93,700.79 3458.66,700.79 3551.18,700.79 3811.02,700.79 3872.05,700.79 3994.09,700.79 4062.99,700.79 4250,700.79 4320.87,700.79 4744.09,700.79 4793.31,700.79 4907.48,700.79 5015.75,700.79 -118.11,720.47 982.28,724.41 4771.65,724.41 4720.47,730.31 435.04,732.28 3450.79,732.28 2783.46,734.25 5625.98,734.25 6143.7,734.25 505.91,736.22 5401.57,738.19 5429.13,738.19 4915.35,748.03 4952.76,748.03 5706.69,750 5844.49,750 5104.33,753.94 2606.3,757.87 3803.15,757.87 2714.57,759.84 3683.07,759.84 5976.38,759.84 5078.74,765.75 1759.84,767.72 4801.18,767.72 2661.42,771.65 5401.57,773.62 5429.13,773.62 598.43,775.59 698.82,775.59 899.61,775.59 3259.84,775.59 3153.54,777.56 437.01,781.5 198.82,785.43 3366.14,787.4 3452.76,791.34 277.56,795.28 348.43,799.21 5564.96,801.18 5653.54,803.15 3316.93,805.12 5023.62,805.12 3074.8,807.09 5401.57,809.06 5429.13,809.06 -118.11,812.99 39.37,814.96 3405.51,814.96 5074.8,816.93 2889.76,818.9 498.03,822.83 519.69,822.83 687.01,822.83 5714.57,822.83 -39.37,824.8 397.64,824.8 6143.7,826.77 3206.69,832.68 5009.84,838.58 273.62,840.55 4966.54,840.55 5401.57,840.55 5429.13,840.55 17.72,846.46 320.87,846.46 3133.86,846.46 5606.3,846.46 616.14,854.33 846.46,856.3 1118.11,860.24 72.83,862.2 163.39,862.2 3263.78,862.2 3003.94,868.11 273.62,877.95 1005.91,879.92 454.72,883.86 4692.91,887.8 616.14,891.73 846.46,891.73 370.08,893.7 3293.31,897.64 5694.88,899.61 5547.24,901.57 43.31,903.54 -118.11,905.51 5078.74,905.51 5346.46,907.48 90.55,909.45 5466.54,911.42 6143.7,919.29 547.24,921.26 4791.34,921.26 4832.68,921.26 4872.05,921.26 5078.74,927.17 5978.35,929.13 781.5,933.07 5633.86,933.07 5818.9,935.04 397.64,937.01 858.27,938.98 3269.69,940.94 1015.75,942.91 3385.83,942.91 163.39,946.85 627.95,948.82 4375.98,948.82 5500,950.79 3883.86,952.76 4261.81,952.76 295.28,954.72 5588.58,954.72 4789.37,964.57 4872.05,964.57 480.31,972.44 529.53,972.44 742.13,972.44 706.69,974.41 933.07,976.38 972.44,976.38 860.24,980.31 775.59,992.13 5448.82,994.09 -118.11,998.03 647.64,998.03 3988.19,1000 5519.69,1000 452.76,1003.94 570.87,1003.94 4789.37,1003.94 4832.68,1003.94 4872.05,1003.94 314.96,1005.91 368.11,1005.91 1460.63,1005.91 1267.72,1009.84 6143.7,1011.81 4332.68,1013.78 -59.06,1015.75 -27.56,1015.75 1147.64,1021.65 5269.69,1025.59 627.95,1027.56 856.3,1027.56 1021.65,1037.4 5401.57,1043.31 5429.13,1043.31 4163.39,1051.18 155.51,1061.02 5809.06,1062.99 3935.04,1066.93 5984.25,1070.87 3399.61,1072.83 3474.41,1072.83 4287.4,1072.83 -59.06,1074.8 5602.36,1074.8 5659.45,1074.8 3996.06,1076.77 5401.57,1078.74 5429.13,1078.74 403.54,1082.68 -118.11,1090.55 246.06,1090.55 5505.91,1094.49 4208.66,1102.36 6143.7,1104.33 27.56,1106.3 3240.16,1108.27 5401.57,1114.17 5429.13,1114.17 5612.2,1116.14 1155.51,1122.05 4088.58,1125.98 3895.67,1129.92 283.46,1135.83 2966.54,1137.8 3466.54,1139.76 5401.57,1145.67 3996.06,1151.57 143.7,1153.54 5795.28,1155.51 1135.83,1171.26 1244.09,1171.26 1381.89,1171.26 1509.84,1171.26 1594.49,1171.26 1679.13,1171.26 1763.78,1171.26 1848.43,1171.26 1911.42,1171.26 2017.72,1171.26 2289.37,1171.26 2372.05,1171.26 2440.94,1171.26 216.54,1175.2 291.34,1175.2 4938.98,1181.1 -118.11,1183.07 562.99,1185.04 3494.09,1187.01 5238.19,1187.01 870.08,1188.98 4137.8,1190.94 4751.97,1190.94 5185.04,1190.94 781.5,1192.91 -29.53,1196.85 423.23,1196.85 6143.7,1196.85 161.42,1200.79 4366.14,1202.76 4307.09,1204.72 960.63,1206.69 3866.14,1208.66 4407.48,1208.66 5466.54,1208.66 5507.87,1212.6 5976.38,1216.54 350.39,1232.28 480.31,1234.25 657.48,1234.25 856.3,1236.22 4015.75,1236.22 980.31,1244.09 4084.65,1244.09 155.51,1248.03 5769.69,1248.03 4820.87,1250 5645.67,1250 5334.65,1253.94 5852.36,1253.94 5503.94,1257.87 5586.61,1257.87 1013.78,1263.78 236.22,1269.68 255.91,1269.68 5403.54,1271.65 -118.11,1275.59 4330.71,1279.53 175.2,1285.43 450.79,1285.43 596.46,1289.37 755.91,1289.37 889.76,1289.37 6143.7,1289.37 291.34,1293.31 328.74,1293.31 27.56,1305.12 -21.65,1307.09 137.8,1307.09 4244.09,1307.09 228.35,1311.02 5507.87,1311.02 5549.21,1314.96 960.63,1316.93 360.24,1332.68 167.32,1334.65 442.91,1334.65 653.54,1334.65 856.3,1334.65 4139.76,1338.58 269.69,1340.55 3706.69,1340.55 3832.68,1340.55 3972.44,1340.55 289.37,1342.52 3586.61,1344.49 4944.88,1344.49 3503.94,1354.33 5370.08,1364.17 5498.03,1366.14 -118.11,1368.11 1074.8,1368.11 1710.63,1374.02 33.46,1377.95 2525.59,1377.95 6143.7,1381.89 163.39,1383.86 212.6,1383.86 1555.12,1383.86 1431.1,1385.83 1139.76,1389.76 1204.72,1389.76 1293.31,1389.76 1360.24,1389.76 4275.59,1399.61 5992.13,1401.57 1045.28,1403.54 2590.55,1403.54 6037.4,1403.54 1883.86,1407.48 305.12,1409.45 4017.72,1413.39 1486.22,1419.29 4944.88,1425.2 1562.99,1427.17 163.39,1429.13 6127.95,1433.07 6021.65,1437.01 5564.96,1438.98 433.07,1452.76 5336.61,1452.76 5531.5,1452.76 980.31,1458.66 5805.12,1458.66 5826.77,1458.66 -118.11,1460.63 5452.76,1460.63 5494.09,1460.63 1637.8,1462.6 27.56,1464.57 5566.93,1464.57 5397.64,1466.54 5954.72,1468.5 521.65,1470.47 1023.62,1472.44 1053.15,1472.44 3561.02,1472.44 3702.76,1472.44 6143.7,1474.41 588.58,1476.38 3033.46,1476.38 1708.66,1478.35 4608.27,1478.35 1484.25,1480.31 1547.24,1480.31 5856.3,1482.28 927.17,1486.22 4541.34,1486.22 5533.46,1488.19 5566.93,1490.16 350.39,1492.13 5498.03,1492.13 5407.48,1494.09 750,1496.06 5448.82,1496.06 5251.97,1503.94 4944.88,1505.91 588.58,1509.84 472.44,1511.81 1559.06,1511.81 147.64,1513.78 279.53,1513.78 1484.25,1513.78 1523.62,1513.78 1834.65,1515.75 5728.35,1515.75 314.96,1517.72 505.91,1529.53 4464.57,1529.53 5958.66,1529.53 45.28,1539.37 917.32,1539.37 2588.58,1539.37 3374.02,1539.37 3043.31,1541.34 830.71,1543.31 4594.49,1543.31 767.72,1545.28 1023.62,1545.28 1055.12,1545.28 -118.11,1553.15 368.11,1557.09 1879.92,1557.09 466.54,1559.06 649.61,1559.06 708.66,1559.06 145.67,1566.93 1639.76,1574.8 6137.8,1584.65 4944.88,1586.61 1722.44,1588.58 3425.2,1592.52 1555.12,1594.49 3629.92,1598.43 3779.53,1598.43 4141.73,1600.39 -31.5,1602.36 3996.06,1602.36 5387.8,1604.33 1639.76,1612.2 3507.87,1612.2 773.62,1616.14 1025.59,1616.14 1053.15,1616.14 1781.5,1618.11 431.1,1620.08 1801.18,1622.05 279.53,1631.89 5389.76,1635.83 5187.01,1639.76 1708.66,1649.61 5312.99,1649.61 188.98,1651.57 33.46,1653.54 442.91,1653.54 462.6,1653.54 6143.7,1659.45 5389.76,1661.42 133.86,1663.39 809.06,1665.35 889.76,1665.35 1651.57,1665.35 4944.88,1667.32 3641.73,1671.26 3769.69,1671.26 5312.99,1671.26 1974.41,1673.23 4397.64,1675.2 265.75,1677.17 232.28,1679.13 4120.08,1681.1 1261.81,1683.07 3911.42,1688.98 624.02,1690.94 84.65,1698.82 842.52,1700.79 3515.75,1700.79 -68.9,1702.76 1021.65,1704.72 1047.24,1704.72 1190.94,1704.72 1647.64,1704.72 1718.5,1704.72 665.35,1706.69 761.81,1706.69 -21.65,1710.63 1346.46,1710.63 1925.2,1710.63 885.83,1714.57 2393.7,1714.57 4620.08,1716.54 5529.53,1716.54 5600.39,1718.5 994.09,1722.44 517.72,1726.38 574.8,1726.38 5645.67,1730.31 5566.93,1732.28 -118.11,1738.19 4275.59,1748.03 4944.88,1748.03 2013.78,1750 6143.7,1751.97 4403.54,1753.94 35.43,1755.91 1858.27,1759.84 5566.93,1759.84 3635.83,1765.75 350.39,1767.72 3793.31,1767.72 -11.81,1777.56 238.19,1783.46 5568.9,1785.43 5179.13,1789.37 5645.67,1795.28 2375.98,1797.24 5598.43,1799.21 2021.65,1820.87 5547.24,1824.8 1976.38,1828.74 4944.88,1828.74 -118.11,1830.71 4527.56,1838.58 6143.7,1844.49 1846.46,1852.36 4407.48,1885.83 5547.24,1903.54 4944.88,1909.45 1488.19,1927.17 1586.61,1927.17 6143.7,1937.01 1746.06,1946.85 4525.59,1950.79 1838.58,1954.72 4401.57,1960.63 5645.67,1962.6 5187.01,1966.54 4944.88,1982.28 5645.67,1982.28 -118.11,2015.75 4503.94,2023.62 4535.43,2023.62 413.39,2025.59 6143.7,2029.53 129.92,2035.43 4448.82,2035.43 5273.62,2055.12 5311.02,2055.12 5350.39,2059.06 4944.88,2070.87 5507.87,2076.77 5576.77,2076.77 5438.98,2078.74 5370.08,2080.71 4374.02,2082.68 4446.85,2082.68 4553.15,2082.68 4049.21,2084.65 27.56,2098.43 -118.11,2108.27 5438.98,2108.27 5576.77,2108.27 5370.08,2110.24 5509.84,2110.24 4086.61,2118.11 5474.41,2118.11 5545.28,2118.11 210.63,2122.05 6143.7,2122.05 4446.85,2129.92 5602.36,2137.8 139.76,2143.7 70.87,2145.67 1946.85,2147.64 2049.21,2147.64 1637.8,2149.61 5507.87,2149.61 1844.49,2151.57 4944.88,2151.57 4618.11,2161.42 5576.77,2161.42 1415.35,2163.39 -61.02,2165.35 4145.67,2165.35 5933.07,2171.26 1340.55,2175.2 4452.76,2175.2 17.72,2187.01 2234.25,2192.91 3480.31,2192.91 -118.11,2200.79 2043.31,2202.76 1860.24,2204.72 5348.43,2206.69 1942.91,2208.66 6143.7,2214.57 1757.87,2220.47 1307.09,2228.35 1586.61,2228.35 507.87,2232.28 675.2,2232.28 1240.16,2232.28 1429.13,2232.28 4944.88,2232.28 1092.52,2234.25 761.81,2236.22 889.76,2236.22 -39.37,2251.97 1848.43,2255.91 1950.79,2257.87 2039.37,2257.87 998.03,2259.84 5594.49,2261.81 5781.5,2261.81 5531.5,2263.78 5561.02,2263.78 263.78,2271.65 5344.49,2273.62 5372.05,2273.62 419.29,2275.59 561.02,2279.53 3771.65,2279.53 35.43,2285.43 3954.72,2285.43 4452.76,2285.43 4557.09,2285.43 687.01,2287.4 5490.16,2289.37 5515.75,2289.37 5541.34,2289.37 5086.61,2291.34 -118.11,2293.31 3602.36,2295.28 5458.66,2299.21 1224.41,2305.12 6143.7,2307.09 1360.24,2314.96 224.41,2324.8 250,2324.8 5848.43,2324.8 763.78,2334.65 917.32,2344.49 1179.13,2344.49 5297.24,2344.49 -23.62,2346.46 3681.1,2346.46 4450.79,2350.39 5374.02,2352.36 5476.38,2358.27 3757.87,2362.2 5318.9,2362.2 5631.89,2370.08 5958.66,2374.02 5297.24,2381.89 -118.11,2385.83 1104.33,2385.83 5057.09,2385.83 5608.27,2389.76 718.5,2393.7 4944.88,2393.7 6143.7,2399.61 868.11,2401.57 55.12,2415.35 293.31,2415.35 1206.69,2419.29 232.28,2425.2 4094.49,2431.1 -74.8,2435.04 779.53,2435.04 5919.29,2435.04 55.12,2437.01 988.19,2437.01 562.99,2438.98 1722.44,2440.94 4551.18,2444.88 -31.5,2446.85 1309.06,2446.85 2370.08,2446.85 1834.65,2450.79 1092.52,2452.76 2240.16,2452.76 492.13,2454.72 3291.34,2454.72 3372.05,2454.72 5787.4,2454.72 3968.5,2456.69 55.12,2460.63 5726.38,2460.63 5968.5,2462.6 4145.67,2474.41 4944.88,2474.41 -118.11,2478.35 862.2,2484.25 675.2,2490.16 931.1,2490.16 4381.89,2492.13 4551.18,2492.13 6143.7,2492.13 779.53,2494.09 1852.36,2498.03 5297.24,2498.03 -33.46,2500 1074.8,2500 5757.87,2503.94 242.13,2509.84 303.15,2509.84 328.74,2509.84 5927.17,2515.75 4236.22,2521.65 53.15,2523.62 505.91,2525.59 462.6,2529.53 5370.08,2529.53 5431.1,2529.53 161.42,2531.5 185.04,2531.5 3314.96,2533.46 5084.65,2533.46 5297.24,2535.43 4332.68,2539.37 4383.86,2539.37 4551.18,2539.37 4066.93,2541.34 53.15,2547.24 562.99,2561.02 3438.98,2562.99 462.6,2568.9 5374.02,2568.9 5397.64,2568.9 5425.2,2568.9 -118.11,2570.87 -70.87,2570.87 53.15,2570.87 -31.5,2572.83 4342.52,2574.8 4555.12,2582.68 6143.7,2584.65 4265.75,2586.61 3375.98,2594.49 5374.02,2594.49 5397.64,2594.49 5425.2,2594.49 4094.49,2602.36 4383.86,2602.36 746.06,2606.3 830.71,2606.3 509.84,2614.17 659.45,2614.17 950.79,2618.11 -68.9,2625.98 -29.53,2627.95 1187.01,2627.95 1549.21,2627.95 1610.24,2627.95 4029.53,2629.92 4127.95,2633.86 874.02,2637.8 255.91,2641.73 151.57,2647.64 387.8,2653.54 1785.43,2653.54 1826.77,2653.54 803.15,2659.45 1187.01,2659.45 1578.74,2659.45 712.6,2661.42 2039.37,2661.42 2198.82,2661.42 2228.35,2661.42 -118.11,2663.39 1145.67,2663.39 255.91,2665.35 151.57,2667.32 5746.06,2675.2 1683.07,2677.17 6143.7,2677.17 433.07,2679.13 655.51,2679.13 2360.24,2681.1 1850.39,2683.07 1901.57,2683.07 1958.66,2687.01 564.96,2688.98 -25.59,2694.88 37.4,2694.88 116.14,2694.88 141.73,2694.88 -80.71,2696.85 3041.34,2696.85 3212.6,2696.85 761.81,2698.82 1070.87,2698.82 1096.46,2698.82 2129.92,2698.82 2190.94,2698.82 2307.09,2702.76 401.57,2704.72 2045.28,2704.72 2805.12,2704.72 1702.76,2706.69 834.65,2712.6 1850.39,2712.6 1901.57,2712.6 2360.24,2712.6 498.03,2714.57 2539.37,2718.5 2421.26,2722.44 712.6,2726.38 763.78,2726.38 2667.32,2734.25 1850.39,2740.16 1901.57,2740.16 3212.6,2742.13 3033.46,2744.09 214.57,2746.06 409.45,2750 112.2,2751.97 -118.11,2755.91 712.6,2755.91 763.78,2755.91 911.42,2757.87 559.06,2761.81 5734.25,2761.81 4944.88,2763.78 5645.67,2763.78 5696.85,2763.78 2866.14,2767.72 5600.39,2767.72 1513.78,2769.68 1850.39,2769.68 1901.57,2769.68 5505.91,2769.68 5537.4,2769.68 6143.7,2769.68 2383.86,2777.56 2438.98,2777.56 3033.46,2777.56 712.6,2783.46 763.78,2783.46 3696.85,2789.37 3767.72,2789.37 3210.63,2791.34 4352.36,2791.34 4379.92,2791.34 4828.74,2793.31 1539.37,2795.28 1984.25,2797.24 183.07,2807.09 5783.46,2807.09 1224.41,2809.06 1244.09,2809.06 1263.78,2809.06 112.2,2811.02 712.6,2812.99 763.78,2812.99 411.42,2818.9 2604.33,2820.87 5700.79,2820.87 2913.39,2822.83 5842.52,2822.83 911.42,2824.8 2824.8,2824.8 1519.69,2826.77 1574.8,2830.71 3994.09,2830.71 2167.32,2832.68 2364.17,2834.65 559.06,2836.61 1222.44,2836.61 1242.13,2836.61 -118.11,2848.43 6143.7,2862.2 3996.06,2864.17 112.2,2870.08 559.06,2872.05 1133.86,2877.95 1159.45,2877.95 1181.1,2877.95 1218.5,2877.95 1240.16,2877.95 1259.84,2877.95 1444.88,2877.95 1464.57,2877.95 1484.25,2877.95 2309.06,2877.95 2364.17,2877.95 2437.01,2877.95 2706.69,2877.95 2744.09,2877.95 3694.88,2877.95 3767.72,2877.95 5777.56,2885.83 4360.24,2889.76 5858.27,2889.76 6047.24,2895.67 5942.91,2897.64 5035.43,2899.61 4937.01,2903.54 5718.5,2905.51 4021.65,2907.48 4757.87,2909.45 6108.27,2911.42 438.98,2915.35 3950.79,2917.32 498.03,2919.29 112.2,2929.13 4062.99,2931.1 -118.11,2940.94 4846.46,2944.88 4937.01,2944.88 5001.97,2944.88 6143.7,2954.72 6096.46,2970.47 4106.3,2976.38 112.2,2988.19 41.34,3000 393.7,3000 1437.01,3007.87 1466.54,3007.87 1539.37,3007.87 1578.74,3007.87 1618.11,3007.87 1657.48,3007.87 1696.85,3007.87 1748.03,3007.87 1767.72,3007.87 210.63,3009.84 431.1,3013.78 474.41,3013.78 517.72,3013.78 561.02,3013.78 5933.07,3015.75 4874.02,3017.72 4988.19,3021.65 4791.34,3023.62 5838.58,3031.5 -118.11,3033.46 1023.62,3033.46 3336.61,3037.4 3385.83,3041.34 6068.9,3047.24 6143.7,3047.24 3996.06,3055.12 3946.85,3057.09 5165.35,3059.06 5218.5,3059.06 1023.62,3062.99 1061.02,3062.99 47.24,3078.74 122.05,3078.74 3476.38,3092.52 574.8,3096.46 3387.8,3096.46 3996.06,3098.43 4094.49,3098.43 179.13,3100.39 1023.62,3100.39 734.25,3102.36 781.5,3102.36 354.33,3104.33 1061.02,3106.3 2098.43,3114.17 2131.89,3114.17 2437.01,3114.17 5165.35,3114.17 5088.58,3122.05 76.77,3124.02 -118.11,3125.98 1448.82,3125.98 5281.5,3125.98 4185.04,3127.95 381.89,3131.89 322.83,3135.83 730.31,3135.83 3385.83,3135.83 5852.36,3135.83 785.43,3137.8 3519.69,3139.76 1023.62,3141.73 1061.02,3141.73 4919.29,3141.73 5238.19,3143.7 592.52,3151.57 4135.83,3151.57 1372.05,3153.54 553.15,3161.42 1551.18,3161.42 1578.74,3161.42 1129.92,3165.35 269.69,3167.32 1425.2,3167.32 1248.03,3169.29 133.86,3171.26 3950.79,3179.13 4045.28,3179.13 4090.55,3179.13 375.98,3181.1 1183.07,3181.1 1551.18,3181.1 1578.74,3181.1 3618.11,3183.07 3667.32,3183.07 4966.54,3183.07 1462.6,3188.98 1748.03,3188.98 1250,3200.79 4935.04,3204.72 303.15,3210.63 598.43,3214.57 246.06,3216.54 547.24,3216.54 647.64,3216.54 1401.57,3216.54 1437.01,3216.54 -118.11,3218.5 480.31,3220.47 4712.6,3232.28 4838.58,3232.28 6143.7,3232.28 5019.69,3234.25 5070.87,3234.25 -66.93,3236.22 4968.5,3238.19 6055.12,3242.13 5883.86,3244.09 4681.1,3255.91 1698.82,3257.87 2775.59,3261.81 4622.05,3263.78 5931.1,3263.78 3370.08,3265.75 3389.76,3265.75 3409.45,3265.75 1383.86,3267.72 -11.81,3283.46 1407.48,3283.46 1437.01,3283.46 4228.35,3283.46 1279.53,3285.43 3370.08,3285.43 3389.76,3285.43 4027.56,3289.37 5261.81,3297.24 5328.74,3297.24 2196.85,3299.21 4673.23,3299.21 4204.72,3307.09 -118.11,3311.02 2244.09,3312.99 5114.17,3330.71 1279.53,3332.68 5013.78,3332.68 2110.24,3334.65 2244.09,3334.65 4608.27,3338.58 5383.86,3340.55 4655.51,3342.52 5269.69,3342.52 -37.4,3344.49 1372.05,3346.46 3761.81,3356.3 3824.8,3356.3 3872.05,3358.27 3948.82,3358.27 3029.53,3364.17 5763.78,3385.83 5854.33,3385.83 5944.88,3385.83 5.91,3387.8 96.46,3387.8 187.01,3387.8 277.56,3387.8 368.11,3387.8 458.66,3387.8 549.21,3387.8 639.76,3387.8 730.31,3387.8 820.87,3387.8 911.42,3387.8 1001.97,3387.8 1092.52,3387.8 1183.07,3387.8 1273.62,3387.8 1364.17,3387.8 1454.72,3387.8 1545.28,3387.8 1635.83,3387.8 1726.38,3387.8 1816.93,3387.8 1907.48,3387.8 1998.03,3387.8 2088.58,3387.8 2179.13,3387.8 2269.69,3387.8 2360.24,3387.8 2450.79,3387.8 2541.34,3387.8 2631.89,3387.8 2722.44,3387.8 2812.99,3387.8 2903.54,3387.8 2994.09,3387.8 3084.65,3387.8 3175.2,3387.8 3265.75,3387.8 3314.96,3387.8 3356.3,3387.8 3411.42,3387.8 3446.85,3387.8 3537.4,3387.8 3627.95,3387.8 3718.5,3387.8 3775.59,3387.8 3866.14,3387.8 3956.69,3387.8 4047.24,3387.8 4137.8,3387.8 4228.35,3387.8 4318.9,3387.8 4409.45,3387.8 4500,3387.8 4590.55,3387.8 4681.1,3387.8 4771.65,3387.8 4862.2,3387.8 4952.76,3387.8 5043.31,3387.8 5133.86,3387.8 5224.41,3387.8 5314.96,3387.8 5405.51,3387.8 5496.06,3387.8 5586.61,3387.8 5677.17,3387.8
GPIO_VREF: R169.1 R170.1 R171.1 R173.2 R175.1 R180.1 R181.2 U33.78 | length 8966.6
  Top w3.94: R173.2@1155.51,74.8 v1(1155.51,53.15) R175.1@1155.51,35.43 1137.1,53.85 1131.39,53.85 1116.14,69.1 1116.14,527.98 1442.49,854.33 2448.2,854.33 2856.3,1262.43 2856.3,2219.78 2883.86,2247.34 v1(2883.86,2265.75) ; v1(1279.53,53.15) R180.1@1279.53,35.43 R181.2@1320.87,35.43 ; R170.1@2318.9,2230.31 2358.27,2230.31 2389.76,2198.82 2570.87,2198.82 v1(2637.8,2265.75) ; v1(4188.98,2633.86) v1(4000,2444.88) 3913.39,2358.27 3913.39,1771.65 4185.04,1500 4185.04,1204.72 4413.39,976.38 R171.1@4413.39,596.46 ; v1(5080.71,2702.76) R169.1@5080.71,2734.25
  Top w7.87: v1(4383.86,2633.86) 4415.16,2633.86 U33.78@4415.75,2633.27
  Bottom w3.94: v1(1155.51,53.15) v1(1279.53,53.15) ; v1(2637.8,2265.75) v1(2883.86,2265.75) 2905.51,2244.09 3490.88,2244.09 3670.02,2423.23 3978.35,2423.23 v1(4000,2444.88) ; v1(4188.98,2633.86) v1(4383.86,2633.86) 4421.26,2633.86 4509.84,2722.44 4700.79,2722.44 4720.47,2702.76 v1(5080.71,2702.76)
HDMI_TX0N_PORT: J1.9 U2.2 U2.9 U33.184 | length 4093.4
  Top w3.94: J1.9@787.41,206.69 787.41,261.82 803.15,277.56 803.15,307.08 797.24,312.99 U2.9@797.24,331.21 U2.2@797.24,365.65 797.24,375 803.15,380.9 803.15,407.48 1364.17,968.5 2394.38,968.5 2750,1324.13 2750,2463.89 2962.68,2676.57 3045.28,2676.57 3049.21,2680.51 U33.184@3075.2,2680.51
HDMI_TX0P_PORT: J1.7 U2.1 U2.10 U33.182 | length 4080.4
  Top w3.94: J1.7@826.78,206.69 826.78,261.81 811.03,277.55 811.03,307.09 816.93,312.99 U2.10@816.93,331.21 U2.1@816.93,365.65 816.93,375 811.02,380.9 811.02,404.22 1367.43,960.63 2397.64,960.63 2757.87,1320.87 2757.87,2460.63 2965.94,2668.7 3045.28,2668.7 3049.21,2664.76 U33.182@3075.2,2664.76
HDMI_TX1N_PORT: J1.6 U1.5 U1.6 U33.178 | length 4024.8
  Top w3.94: J1.6@846.46,206.69 846.46,261.81 862.2,277.56 862.2,307.09 856.3,312.99 U1.6@856.3,331.21 U1.5@856.3,365.65 856.3,375 862.21,380.9 862.21,422.55 1384.54,944.88 2410.12,944.88 2773.62,1308.38 2773.62,2450.11 2952.84,2629.33 3045.28,2629.33 3049.21,2633.27 U33.178@3075.2,2633.27
HDMI_TX1P_PORT: J1.4 U1.4 U1.7 U33.176 | length 4011.7
  Top w3.94: J1.4@885.83,206.69 885.83,261.81 870.08,277.56 870.08,307.09 875.98,312.99 U1.7@875.99,331.21 U1.4@875.99,365.65 875.99,375 870.08,380.9 870.08,419.29 1387.8,937.01 2413.39,937.01 2781.5,1305.12 2781.5,2446.85 2956.1,2621.46 3045.28,2621.46 3049.21,2617.52 U33.176@3075.2,2617.52
HDMI_TX2N_PORT: J1.3 U1.2 U1.9 U33.172 | length 3960.9
  Top w3.94: J1.3@905.52,206.69 905.52,261.82 921.26,277.56 921.26,307.08 915.35,313 U1.9@915.35,331.21 U1.2@915.35,365.65 915.35,375 921.26,380.9 921.26,438.1 1404.42,921.26 2427.84,921.26 2797.24,1290.66 2797.24,2442.04 2937.29,2582.09 3045.28,2582.09 3049.21,2586.02 U33.172@3075.2,2586.02
HDMI_TX2P_PORT: J1.1 U1.1 U1.10 U33.170 | length 3947.9
  Top w3.94: J1.1@944.89,206.69 944.89,261.81 929.14,277.55 929.14,307.09 935.04,312.99 U1.10@935.04,331.21 U1.1@935.04,365.65 935.04,375 929.13,380.9 929.13,434.84 1407.68,913.39 2431.1,913.39 2805.12,1287.4 2805.12,2438.78 2940.55,2574.21 3045.28,2574.21 3049.21,2570.28 U33.170@3075.2,2570.28
HDMI_TX_CEC_PORT: ED4.1 J1.13 U33.151 | length 4526.3
  Top w3.94: J1.13@708.67,206.69 708.67,326.77 ED4.1@702.76,332.68 696.85,338.58 693.92,338.58 693.92,347.42 685.04,356.3 685.04,395.87 923.03,633.86 923.03,635.15 933.07,645.19 956.58,645.19 1331.08,1019.68 2374.02,1019.68 2625.98,1271.65 v1(2625.98,1328.74) ; v1(3096.46,1555.12) 3188.98,1555.12 3379.92,1746.06 3379.92,2274.3 3225.68,2428.54 U33.151@3179.13,2428.54
  Bottom w3.94: v1(2625.98,1328.74) 2665.88,1368.64 2665.88,1380.45 3019.69,1734.25 3069.32,1734.25 3096.46,1707.11 v1(3096.46,1555.12)
HDMI_TX_HPD_PORT: ED1.1 J1.19 U33.153 | length 4748.7
  Top w3.94: J1.19@590.56,206.69 590.56,326.77 ED1.1@584.65,332.68 578.74,338.58 575.81,338.58 575.81,347.42 566.93,356.3 566.93,429.13 814.96,677.17 955.06,677.17 1321.2,1043.31 2364.23,1043.31 2543.31,1222.38 v1(2543.31,1328.74) ; v1(3074.8,1555.12) 3088.58,1541.34 3187.01,1541.34 3387.8,1742.13 3387.8,2277.56 3221.06,2444.29 U33.153@3179.13,2444.29
  Bottom w3.94: v1(2543.31,1328.74) 2579.82,1328.74 2593.6,1314.96 2631.69,1314.96 2677.17,1360.43 2677.17,1379.92 3023.62,1726.38 3066.06,1726.38 3078.74,1713.69 3078.74,1588.58 3074.8,1584.64 v1(3074.8,1555.12)
HDMI_TXCLKN_PORT: J1.12 U2.5 U2.6 U33.190 | length 4170.1
  Top w3.94: J1.12@728.35,206.69 728.35,261.81 744.09,277.56 744.09,307.09 738.19,312.99 U2.6@738.19,331.21 U2.5@738.19,365.65 738.19,375 744.1,380.9 744.1,390.41 1345.81,992.13 2376.66,992.13 2726.38,1341.84 2726.38,2495.39 2954.81,2723.82 3045.28,2723.82 3049.21,2727.76 U33.190@3075.2,2727.76
HDMI_TXCLKP_PORT: J1.10 U2.4 U2.7 U33.188 | length 4157.1
  Top w3.94: J1.10@767.72,206.69 767.72,261.81 751.97,277.56 751.97,307.09 757.87,312.99 U2.7@757.88,331.21 U2.4@757.88,365.65 757.88,375 751.97,380.9 751.97,387.15 1349.08,984.25 2379.92,984.25 2734.25,1338.58 2734.25,2492.13 2958.07,2715.94 3045.28,2715.94 3049.21,2712.01 U33.188@3075.2,2712.01
HDMI_TXDDC_SCL_PORT: ED3.1 J1.15 U33.200 | length 4346.8
  Top w3.94: J1.15@669.3,206.69 669.3,326.77 ED3.1@663.39,332.68 657.48,338.58 654.55,338.58 654.55,347.42 645.67,356.3 645.67,449.91 754.81,559.06 807.09,559.06 905.51,657.48 957.71,657.48 1327.79,1027.56 2370.75,1027.56 2610.24,1267.04 2610.24,1336.5 2704.72,1430.99 2704.72,2533.27 2977.95,2806.5 U33.200@3075.2,2806.5
HDMI_TXDDC_SDA_PORT: ED2.1 J1.16 U33.199 | length 4490.8
  Top w3.94: J1.16@649.61,206.69 649.61,307.09 ED2.1@624.02,332.68 618.11,338.58 615.18,338.58 615.18,347.42 606.3,356.3 606.3,421.68 751.55,566.93 803.83,566.93 902.25,665.35 954.42,665.35 1324.5,1035.43 2367.49,1035.43 2600.39,1268.33 2600.39,1341.82 2696.85,1438.27 2696.85,2551.18 v1(2938.98,2793.31) ; v1(3149.61,2807.09) 3178.54,2807.09 U33.199@3179.13,2806.5
  Bottom w3.94: v1(2938.98,2793.31) 3135.83,2793.31 v1(3149.61,2807.09)
HP_DET_L_GPIO4_C4: J24.70 R31.2 | length 3846
  Top w3.94: J24.70@3650.98,3320.08 3651.57,3319.49 v1(3651.57,3289.37) ; R31.2@4624.02,490.16 4624.02,503.94 4614.17,513.78 4614.17,608.27 4608.27,614.17 4608.27,1180.31 4789.37,1361.41 4789.37,2905.51 v1(4744.09,2950.79)
  Bottom w3.94: v1(3651.57,3289.37) 3651.57,3295.28 3667.32,3311.02 3826.77,3311.02 3881.89,3255.91 4160.63,3255.91 4343.7,3072.83 4622.05,3072.83 v1(4744.09,2950.79)
HP_SNS: J24.52 R30.2 | length 3786.9
  Top w7.87: J24.52@3792.72,3320.08 3793.31,3319.49 v1(3793.31,3265.75)
  Top w11.81: R30.2@4545.28,344.49 4545.28,478.35 4564.96,498.03 4564.96,1198.25 4746.06,1379.35 4746.06,2864.17 v1(4661.42,2948.82)
  Bottom w11.81: v1(3793.31,3265.75) 3793.31,3248.03 3824.8,3216.54 4144.32,3216.54 4327.39,3033.46 4576.77,3033.46 v1(4661.42,2948.82)